# EAGLE board A (EAGLE 7.3.0)
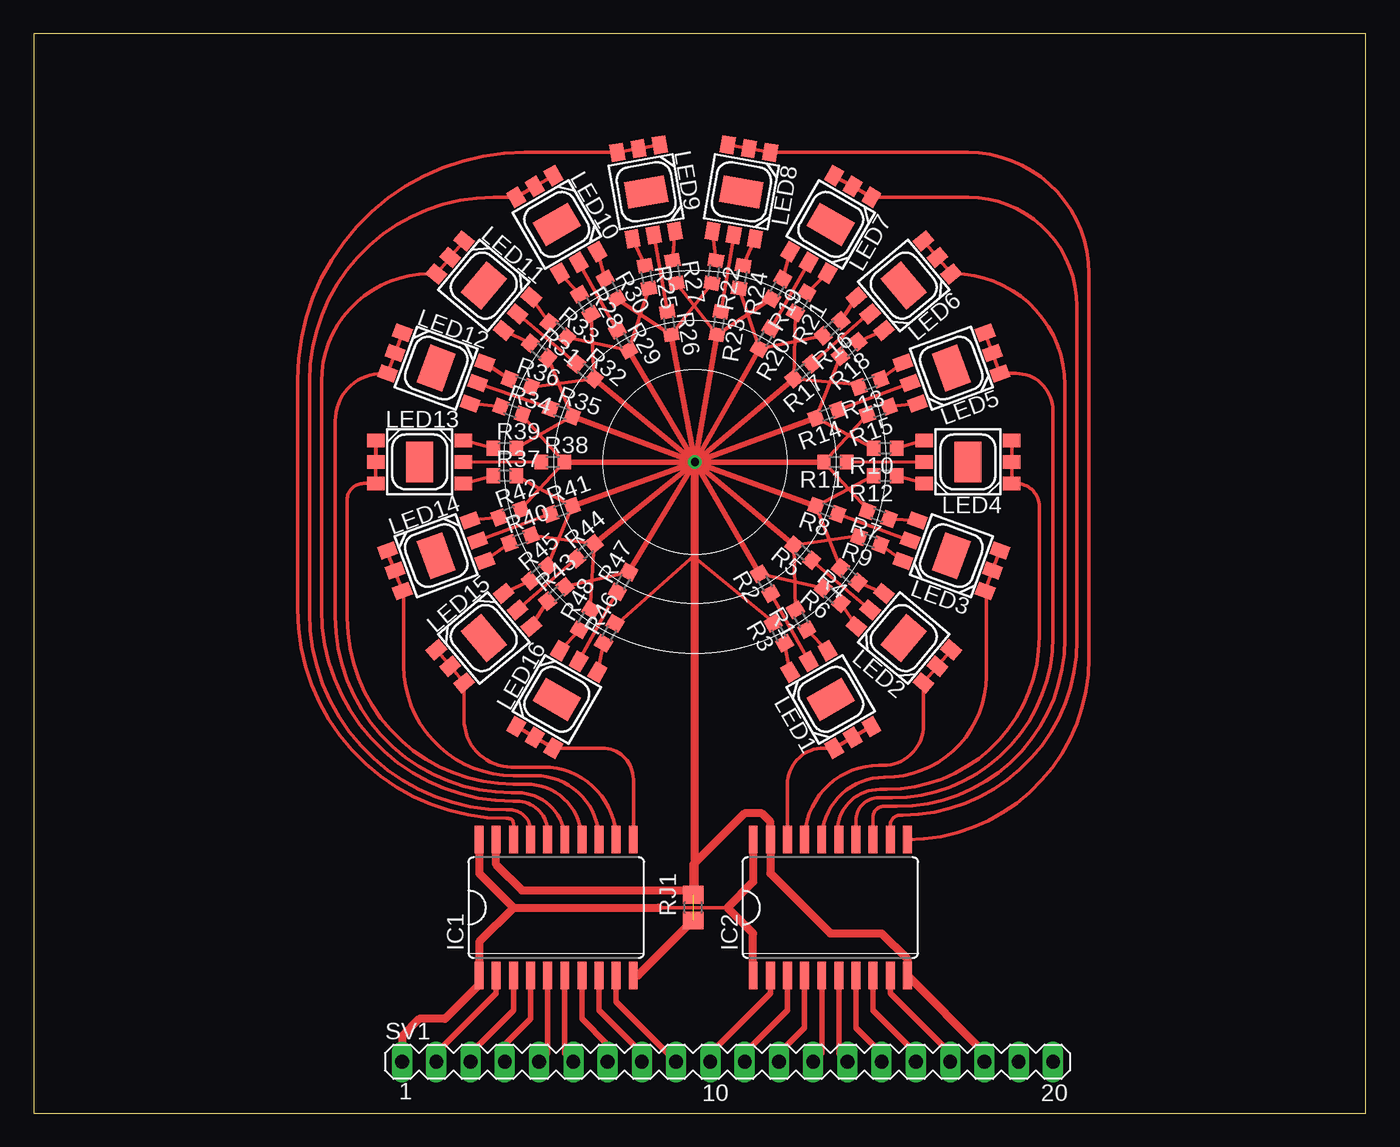
[diagram p0: board, top side]

Size 98.75 x 80 mm. Coordinates in mm from the lower left corner, seen from the top.
Outline: 0,0 98.75,0 98.75,80 0,80 0,0
Copper layers (1*16): Top 0.035mm / dielectric 1.5mm / Bottom 0.035mm
Design rules "default": minimum track width 10mil, minimum drill 24mil, track to track 8mil, track to pad 8mil, pad to pad 8mil, via to via 8mil, smd to smd 8mil, copper to edge 40mil, drill to drill 8mil, minimum pad ring 10mil, minimum via ring 8mil, stop-mask expansion 4mil, vias tented up to drill 0mil, thermal gap 10mil

## Footprints (pad centres in the part's own frame; a part is rotated, then mirrored left to right if it is on the bottom)
SO20W = smd 0.66 x 2.032: 1 -5.715,-5.029; 2 -4.445,-5.029; 3 -3.175,-5.029; 4 -1.905,-5.029; 5 -0.635,-5.029; 6 0.635,-5.029; 7 1.905,-5.029; 8 3.175,-5.029; 9 4.445,-5.029; 10 5.715,-5.029; 11 5.715,5.029; 12 4.445,5.029; 13 3.175,5.029; 14 1.905,5.029; 15 0.635,5.029; 16 -0.635,5.029; 17 -1.905,5.029; 18 -3.175,5.029; 19 -4.445,5.029; 20 -5.715,5.029
LP2C63-ST-RGB-SR0 = smd 1.3 x 1: 1 -3.25,1.6; 2 -3.25,0; 3 -3.25,-1.6; 4 3.25,-1.6; 5 3.25,0; 6 3.25,1.6 | smd 2 x 3: TH 0,0
R0603 = smd 1 x 1.1: 1 -0.85,0; 2 0.85,0
R0805 = smd 1.3 x 1.5: 1 -0.95,0; 2 0.95,0
MA20-1 = drill 1.016 long: 1 -24.13,0; 2 -21.59,0; 3 -19.05,0; 4 -16.51,0; 5 -13.97,0; 6 -11.43,0; 7 -8.89,0; 8 -6.35,0; 9 -3.81,0; 10 -1.27,0; 11 1.27,0; 12 3.81,0; 13 6.35,0; 14 8.89,0; 15 11.43,0; 16 13.97,0; 17 16.51,0; 18 19.05,0; 19 21.59,0; 20 24.13,0

## Placement (x,y rotation side)
IC1  74LS245DW  [SO20W]  38.73,15.24 0 top
IC2  74LS245DW  [SO20W]  59.05,15.24 0 top
LED1  LP2C63-ST-RGB-SR0  [LP2C63-ST-RGB-SR0]  59.09,30.67 120 top
LED2  LP2C63-ST-RGB-SR0  [LP2C63-ST-RGB-SR0]  64.5,35.21 140 top
LED3  LP2C63-ST-RGB-SR0  [LP2C63-ST-RGB-SR0]  68.03,41.32 160 top
LED4  LP2C63-ST-RGB-SR0  [LP2C63-ST-RGB-SR0]  69.25,48.27 180 top
LED5  LP2C63-ST-RGB-SR0  [LP2C63-ST-RGB-SR0]  68.03,55.22 200 top
LED6  LP2C63-ST-RGB-SR0  [LP2C63-ST-RGB-SR0]  64.5,61.33 220 top
LED7  LP2C63-ST-RGB-SR0  [LP2C63-ST-RGB-SR0]  59.09,65.87 240 top
LED8  LP2C63-ST-RGB-SR0  [LP2C63-ST-RGB-SR0]  52.46,68.28 260 top
LED9  LP2C63-ST-RGB-SR0  [LP2C63-ST-RGB-SR0]  45.41,68.28 280 top
LED10  LP2C63-ST-RGB-SR0  [LP2C63-ST-RGB-SR0]  38.77,65.87 300 top
LED11  LP2C63-ST-RGB-SR0  [LP2C63-ST-RGB-SR0]  33.37,61.33 320 top
LED12  LP2C63-ST-RGB-SR0  [LP2C63-ST-RGB-SR0]  29.84,55.22 340 top
LED13  LP2C63-ST-RGB-SR0  [LP2C63-ST-RGB-SR0]  28.61,48.27 0 top
LED14  LP2C63-ST-RGB-SR0  [LP2C63-ST-RGB-SR0]  29.84,41.32 20 top
LED15  LP2C63-ST-RGB-SR0  [LP2C63-ST-RGB-SR0]  33.37,35.21 40 top
LED16  LP2C63-ST-RGB-SR0  [LP2C63-ST-RGB-SR0]  38.77,30.67 60 top
R1  [R0603]  56.9,36.58 120 top
R2  [R0603]  54.23,39.24 120 top
R3  [R0603]  55.24,35.56 120 top
R4  [R0603]  60.45,39.88 140 top
R5  [R0603]  57.02,41.53 140 top
R6  [R0603]  59.18,38.35 140 top
R7  [R0603]  62.61,44.32 160 top
R8  [R0603]  58.8,44.7 160 top
R9  [R0603]  61.98,42.42 160 top
R10  [R0603]  63.12,49.28 180 top
R11  [R0603]  59.44,48.26 180 top
R12  [R0603]  63.12,47.24 180 top
R13  [R0603]  61.98,54.1 200 top
R14  [R0603]  58.8,51.82 200 top
R15  [R0603]  62.61,52.07 200 top
R16  [R0603]  59.18,58.17 220 top
R17  [R0603]  57.02,54.99 220 top
R18  [R0603]  60.45,56.64 220 top
R19  [R0603]  55.12,61.09 240 top
R20  [R0603]  54.23,57.4 240 top
R21  [R0603]  56.9,60.07 240 top
R22  [R0603]  50.42,62.36 260 top
R23  [R0603]  50.8,58.55 260 top
R24  [R0603]  52.45,61.98 260 top
R25  [R0603]  45.47,61.98 280 top
R26  [R0603]  47.12,58.55 280 top
R27  [R0603]  47.5,62.36 280 top
R28  [R0603]  40.89,59.94 300 top
R29  [R0603]  43.69,57.28 300 top
R30  [R0603]  42.8,61.09 300 top
R31  [R0603]  37.47,56.52 320 top
R32  [R0603]  40.89,54.99 320 top
R33  [R0603]  38.86,58.04 320 top
R34  [R0603]  35.43,52.07 340 top
R35  [R0603]  39.12,51.94 340 top
R36  [R0603]  36.07,54.1 340 top
R37  [R0603]  34.92,47.24 0 top
R38  [R0603]  38.48,48.26 0 top
R39  [R0603]  34.92,49.28 0 top
R40  [R0603]  36.07,42.55 20 top
R41  [R0603]  39.12,44.7 20 top
R42  [R0603]  35.31,44.45 20 top
R43  [R0603]  38.73,38.48 40 top
R44  [R0603]  40.89,41.66 40 top
R45  [R0603]  37.47,40.01 40 top
R46  [R0603]  42.67,35.56 60 top
R47  [R0603]  43.69,39.37 60 top
R48  [R0603]  40.89,36.58 60 top
RJ1  [R0805]  48.9,15.24 90 top
SV1  [MA20-1]  51.44,3.81 0 top

## Library data of the parts
IC1 IC2 = 74xx-us
LED1-LED16 = led
R1-R48 = eagle-ltspice; SPICEMODEL: 100Ω; SPICEPREFIX: R
RJ1 = eagle-ltspice; SPICEMODEL: NONE; SPICEPREFIX: R
SV1 = con-lstb; OC_FARNELL: unknown; OC_NEWARK: unknown

## Nets
GND: IC1.10 IC1.19 IC2.10 IC2.19 R1.2 R2.2 R3.2 R4.2 R5.2 R6.2 R7.2 R8.2 R9.2 R10.2 R11.2 R12.2 R13.2 R14.2 R15.2 R16.2 R17.2 R18.2 R19.2 R20.2 R21.2 R22.2 R23.2 R24.2 R25.2 R26.2 R27.2 R28.2 R29.2 R30.2 R31.2 R32.2 R33.2 R34.2 R35.2 R36.2 R37.2 R38.2 R39.2 R40.2 R41.2 R42.2 R43.2 R44.2 R45.2 R46.2 R47.2 R48.2 RJ1.1 RJ1.2 SV1.18
N$1: LED1.4 R1.1
N$2: LED1.5 R2.1
N$3: LED1.6 R3.1
N$4: LED2.4 R4.1
N$5: LED2.5 R5.1
N$6: LED2.6 R6.1
N$7: LED3.4 R7.1
N$8: LED3.5 R8.1
N$9: LED3.6 R9.1
N$10: LED4.4 R10.1
N$11: LED4.5 R11.1
N$12: LED4.6 R12.1
N$13: LED5.4 R13.1
N$14: LED5.5 R14.1
N$15: LED5.6 R15.1
N$16: LED6.4 R16.1
N$17: LED6.5 R17.1
N$18: LED6.6 R18.1
N$19: LED7.4 R19.1
N$20: LED7.5 R20.1
N$21: LED7.6 R21.1
N$22: LED8.4 R22.1
N$23: LED8.5 R23.1
N$24: LED8.6 R24.1
N$25: LED9.4 R25.1
N$26: LED9.5 R26.1
N$27: LED9.6 R27.1
N$28: LED10.4 R28.1
N$29: LED10.5 R29.1
N$30: LED10.6 R30.1
N$31: LED11.4 R31.1
N$32: LED11.5 R32.1
N$33: LED11.6 R33.1
N$34: LED12.4 R34.1
N$35: LED12.5 R35.1
N$36: LED12.6 R36.1
N$37: LED13.4 R37.1
N$38: LED13.5 R38.1
N$39: LED13.6 R39.1
N$40: LED14.4 R40.1
N$41: LED14.5 R41.1
N$42: LED14.6 R42.1
N$43: LED15.4 R43.1
N$44: LED15.5 R44.1
N$45: LED15.6 R45.1
N$46: LED16.4 R46.1
N$47: LED16.5 R47.1
N$48: LED16.6 R48.1
O1: IC2.18 LED1.1 LED1.2 LED1.3
O2: IC2.17 LED2.1 LED2.2 LED2.3
O3: IC2.16 LED3.1 LED3.2 LED3.3
O4: IC2.15 LED4.1 LED4.2 LED4.3
O5: IC2.14 LED5.1 LED5.2 LED5.3
O6: IC2.13 LED6.1 LED6.2 LED6.3
O7: IC2.12 LED7.1 LED7.2 LED7.3
O8: IC2.11 LED8.1 LED8.2 LED8.3
O9: IC1.18 LED9.1 LED9.2 LED9.3
O10: IC1.17 LED10.1 LED10.2 LED10.3
O11: IC1.16 LED11.1 LED11.2 LED11.3
O12: IC1.15 LED12.1 LED12.2 LED12.3
O13: IC1.14 LED13.1 LED13.2 LED13.3
O14: IC1.13 LED14.1 LED14.2 LED14.3
O15: IC1.12 LED15.1 LED15.2 LED15.3
O16: IC1.11 LED16.1 LED16.2 LED16.3
P1: IC1.2 SV1.2
P2: IC1.3 SV1.3
P3: IC1.4 SV1.4
P4: IC1.5 SV1.5
P5: IC1.6 SV1.6
P6: IC1.7 SV1.7
P7: IC1.8 SV1.8
P8: IC1.9 SV1.9
P9: IC2.2 SV1.10
P10: IC2.3 SV1.11
P11: IC2.4 SV1.12
P12: IC2.5 SV1.13
P13: IC2.6 SV1.14
P14: IC2.7 SV1.15
P15: IC2.8 SV1.16
P16: IC2.9 SV1.17
VCC: IC1.1 IC1.20 IC2.1 IC2.20 SV1.1

## Tracks (layer width: path | path; a pad name or v marks a point on that pad's centre or on a via)
GND  (via drill 0.6)  (1 unrouted)
  Top 0.254: R46.2 43.31,36.32 49.02,41.4 | R3.2 54.61,36.58 49.02,41.15 | R43.2 39.12,38.99 R47.2 | R48.2 41.27,37.85 R44.2 R40.2 | R42.2 R38.2 36.45,51.44 R34.2 | R37.2 R41.2 38.23,40.89 R45.2 | R39.2 R35.2 R31.2 | R36.2 R32.2 R28.2 | R33.2 R29.2 R25.2 | R30.2 R26.2 R22.2 | R27.2 R23.2 R19.2 | R24.2 R20.2 R16.2 | R21.2 R17.2 61.21,53.98 R13.2 | R18.2 R14.2 R10.2 | R15.2 R11.2 61.85,44.7 R7.2 | R12.2 R8.2 R4.2 | R9.2 61.09,42.8 R5.2 R1.2 | R6.2 R2.2
  Top 0.406: R47.2 v49.02,48.26 | R2.2 v49.02,48.26 | R5.2 v49.02,48.26 | R8.2 v49.02,48.26 | R11.2 v49.02,48.26 | R14.2 v49.02,48.26 | R17.2 v49.02,48.26 | R20.2 v49.02,48.26 | R23.2 v49.02,48.26 | R26.2 v49.02,48.26 | R29.2 v49.02,48.26 | R32.2 v49.02,48.26 | R35.2 v49.02,48.26 | R38.2 v49.02,48.26 | R41.2 v49.02,48.26 | R44.2 41.66,42.29 v49.02,48.26
  Top 0.61: SV1.18 70.48,4.5 IC2.10 64.77,11.43 62.87,13.34 59.05,13.34 54.61,17.78 IC2.19 | IC1.19 34.29,18.41 36.2,16.51 48.58,16.51 RJ1.2 | IC2.19 54.61,20.32 | IC1.10 44.82,10.21 RJ1.1 | IC2.19 54.61,21.59 53.98,22.23 52.7,22.23 48.9,18.41 RJ1.2 | RJ1.2 arc90 49.02,16.32 49.02,41.15 49.02,41.4 v49.02,48.26
N$1
  Top 0.254: LED1.4 R1.1
N$2
  Top 0.254: LED1.5 R2.1
N$3
  Top 0.254: LED1.6 R3.1
N$4
  Top 0.254: LED2.4 R4.1
N$5
  Top 0.254: LED2.5 R5.1
N$6
  Top 0.254: LED2.6 R6.1
N$7
  Top 0.254: LED3.4 R7.1
N$8
  Top 0.254: LED3.5 R8.1
N$9
  Top 0.254: LED3.6 R9.1
N$10
  Top 0.254: LED4.4 R10.1
N$11
  Top 0.254: LED4.5 R11.1
N$12
  Top 0.254: LED4.6 R12.1
N$13
  Top 0.254: LED5.4 R13.1
N$14
  Top 0.254: LED5.5 R14.1
N$15
  Top 0.254: LED5.6 R15.1
N$16
  Top 0.254: LED6.4 R16.1
N$17
  Top 0.254: LED6.5 61.98,59.31 R17.1
N$18
  Top 0.254: LED6.6 R18.1
N$19
  Top 0.254: LED7.4 R19.1
N$20
  Top 0.254: LED7.5 R20.1
N$21
  Top 0.254: LED7.6 R21.1
N$22
  Top 0.254: LED8.4 R22.1
N$23
  Top 0.254: LED8.5 R23.1
N$24
  Top 0.254: LED8.6 R24.1
N$25
  Top 0.254: LED9.4 R25.1
N$26
  Top 0.254: LED9.5 R26.1
N$27
  Top 0.254: LED9.6 R27.1
N$28
  Top 0.254: LED10.4 R28.1
N$29
  Top 0.254: LED10.5 R29.1
N$30
  Top 0.254: LED10.6 R30.1
N$31
  Top 0.254: LED11.4 R31.1
N$32
  Top 0.254: LED11.5 R32.1
N$33
  Top 0.254: LED11.6 R33.1
N$34
  Top 0.254: LED12.4 R34.1
N$35
  Top 0.254: LED12.5 R35.1
N$36
  Top 0.254: LED12.6 R36.1
N$37
  Top 0.254: LED13.4 32.13,46.74 R37.1
N$38
  Top 0.254: R38.1 LED13.5
N$39
  Top 0.254: LED13.6 R39.1
N$40
  Top 0.254: LED14.4 R40.1
N$41
  Top 0.254: LED14.5 R41.1
N$42
  Top 0.254: LED14.6 R42.1
N$43
  Top 0.254: LED15.4 R43.1
N$44
  Top 0.254: LED15.5 R44.1
N$45
  Top 0.254: LED15.6 R45.1
N$46
  Top 0.254: LED16.4 R46.1
N$47
  Top 0.254: LED16.5 R47.1
N$48
  Top 0.254: LED16.6 R48.1
O1
  Top 0.254: IC2.18 55.88,24.38 arc-90 58.55,27.06 LED1.1 LED1.2 LED1.3
O2
  Top 0.254: IC2.17 arc-90 62.66,25.78 62.99,25.78 arc90 65.96,28.75 LED2.1 LED2.3 LED2.2
O3
  Top 0.254: IC2.16 arc-90 63.04,24.89 63.12,24.89 arc90 70.61,32.38 70.61,38.73 arc-90 70.58,38.71 LED3.1 LED3.2 LED3.3
O4
  Top 0.254: IC2.15 arc-90 59.56,20.4 59.56,20.83 arc-90 62.74,24 63.25,24 arc90 74.55,35.31 74.55,44.96 arc90 72.84,46.67 LED4.1 LED4.2 LED4.3
O5
  Top 0.254: IC2.14 60.96,21.72 arc-90 62.61,23.37 63.63,23.37 arc90 75.56,35.31 75.56,52.07 arc90 72.81,54.83 LED5.1 LED5.2 LED5.3
O6
  Top 0.254: IC2.13 62.23,21.97 arc-90 62.99,22.73 64.01,22.73 arc90 76.45,35.18 76.45,53.98 arc90 68.23,62.2 LED6.1 LED6.3 LED6.2
O7
  Top 0.254: LED7.2 LED7.3 59.18,69.47 LED7.2 | LED7.2 LED7.1 69.28,67.88 arc-90 77.34,59.82 77.34,35.05 arc-90 64.39,22.1 64.26,22.1 arc90 63.5,21.34 IC2.12
O8
  Top 0.254: LED8.3 LED8.1 | LED8.1 69.26,71.2 arc-90 78.23,62.23 78.23,33.73 arc-90 IC2.11 | LED8.2 LED8.1
O9
  Top 0.254: IC1.18 35.56,21.46 arc90 35.18,21.84 35.05,21.84 arc-90 19.56,37.34 19.56,54.36 arc-90 36.41,71.2 LED9.3 LED9.1 LED9.2
O10
  Top 0.254: IC1.17 36.83,20.95 arc90 35.31,22.48 35.05,22.48 arc-90 20.45,37.08 20.45,54.23 arc-90 34.1,67.88 LED10.3 LED10.2 LED10.1
O11
  Top 0.254: IC1.16 38.1,20.83 arc90 35.81,23.11 35.56,23.11 arc-90 21.34,37.34 21.34,54.23 arc-90 29.3,62.2 LED11.3 LED11.1 LED11.2
O12
  Top 0.254: IC1.15 arc90 35.89,23.75 35.43,23.75 arc-90 22.35,36.83 22.35,51.31 arc-90 25.87,54.83 LED12.3 LED12.2 LED12.1
O13
  Top 0.254: IC1.14 arc90 36.52,24.38 35.56,24.38 arc-90 23.24,36.7 23.24,45.47 arc-90 24.45,46.67 LED13.3 25.4,49.91 LED13.1 LED13.2
O14
  Top 0.254: LED14.1 26.16,41.66 | 26.16,41.66 LED14.3 27.33,38.33 arc90 27.43,38.23 27.43,33.15 arc90 35.56,25.02 37.16,25.02 arc-90 IC1.13 | 26.16,41.66 LED14.2
O15
  Top 0.254: IC1.12 arc90 37.8,25.65 35.43,25.65 arc-90 31.91,29.18 LED15.3 LED15.1 LED15.2
O16
  Top 0.254: IC1.11 44.45,24.77 arc90 42.16,27.06 LED16.3 LED16.2 LED16.1
P1
  Top 0.406: IC1.2 34.29,8.89 29.84,4.45 SV1.2
P2
  Top 0.406: IC1.3 35.56,7.62 32.38,4.45 SV1.3
P3
  Top 0.406: IC1.4 36.83,6.99 34.92,5.08 SV1.4
P4
  Top 0.406: IC1.5 38.1,4.45 SV1.5
P5
  Top 0.406: IC1.6 39.37,4.45 SV1.6
P6
  Top 0.406: IC1.7 40.64,6.99 42.55,5.08 SV1.7
P7
  Top 0.406: IC1.8 41.91,7.62 45.09,4.45 SV1.8
P8
  Top 0.406: SV1.9 43.18,8.26 IC1.9
P9
  Top 0.406: SV1.10 50.16,4.45 54.61,8.89 IC2.2
P10
  Top 0.406: IC2.3 55.88,7.62 52.7,4.45 SV1.11
P11
  Top 0.406: IC2.4 57.15,6.35 55.24,4.45 SV1.12
P12
  Top 0.406: IC2.5 58.42,4.45 SV1.13
P13
  Top 0.406: IC2.6 59.69,4.45 SV1.14
P14
  Top 0.406: IC2.7 60.96,6.35 62.87,4.45 SV1.15
P15
  Top 0.406: IC2.8 62.23,7.62 65.41,4.45 SV1.16
P16
  Top 0.406: SV1.17 67.94,4.45 63.5,8.89 IC2.9
VCC
  Top 0.254: 46.35,15.24 51.44,15.24
  Top 0.61: IC1.20 33.02,17.78 35.56,15.24 | 35.56,15.24 46.35,15.24 | IC2.20 53.34,17.14 51.44,15.24 53.34,13.34 IC2.1 | 35.56,15.24 33.02,12.7 IC1.1 33.02,9.53 30.48,6.99 28.57,6.99 27.3,5.71 SV1.1